# Altium PCB Bluetooth_Amplifier.PcbDoc
Units mm, origin at the board's own origin, x right, y up, seen from the top; angles counter-clockwise.
Board outline 110 x 60 mm, 2 copper layers (Top Layer, Bottom Layer); 145 components, 98 nets, 434 pads, 74 vias.
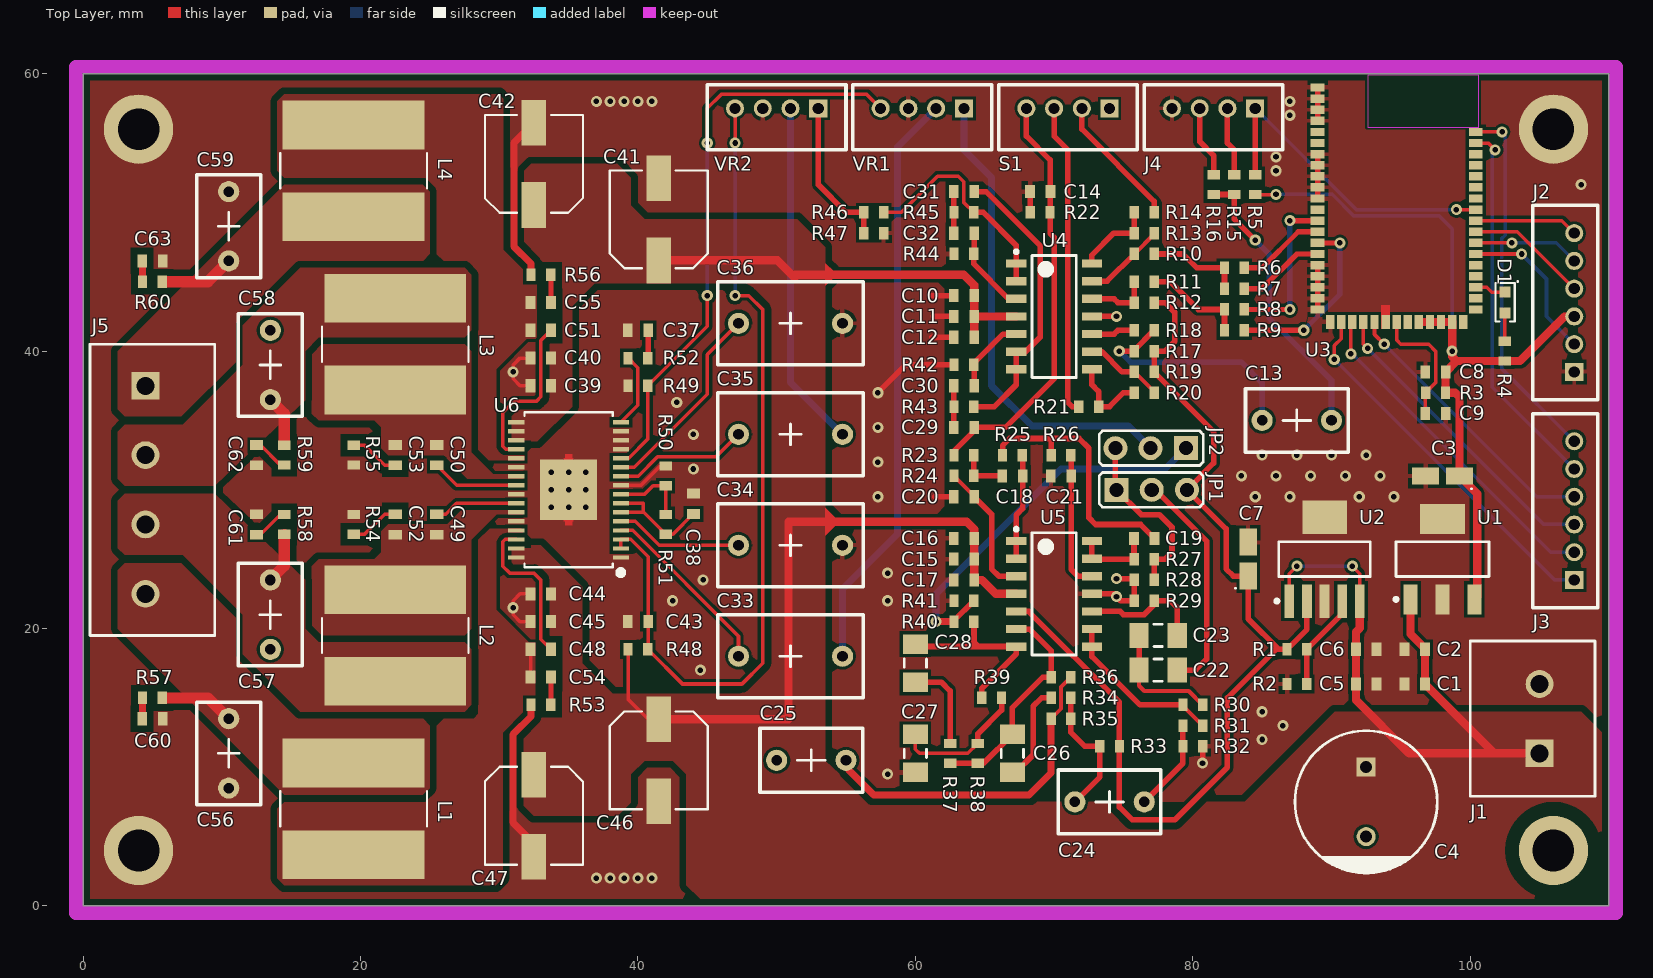
[diagram p0: Top Layer view]
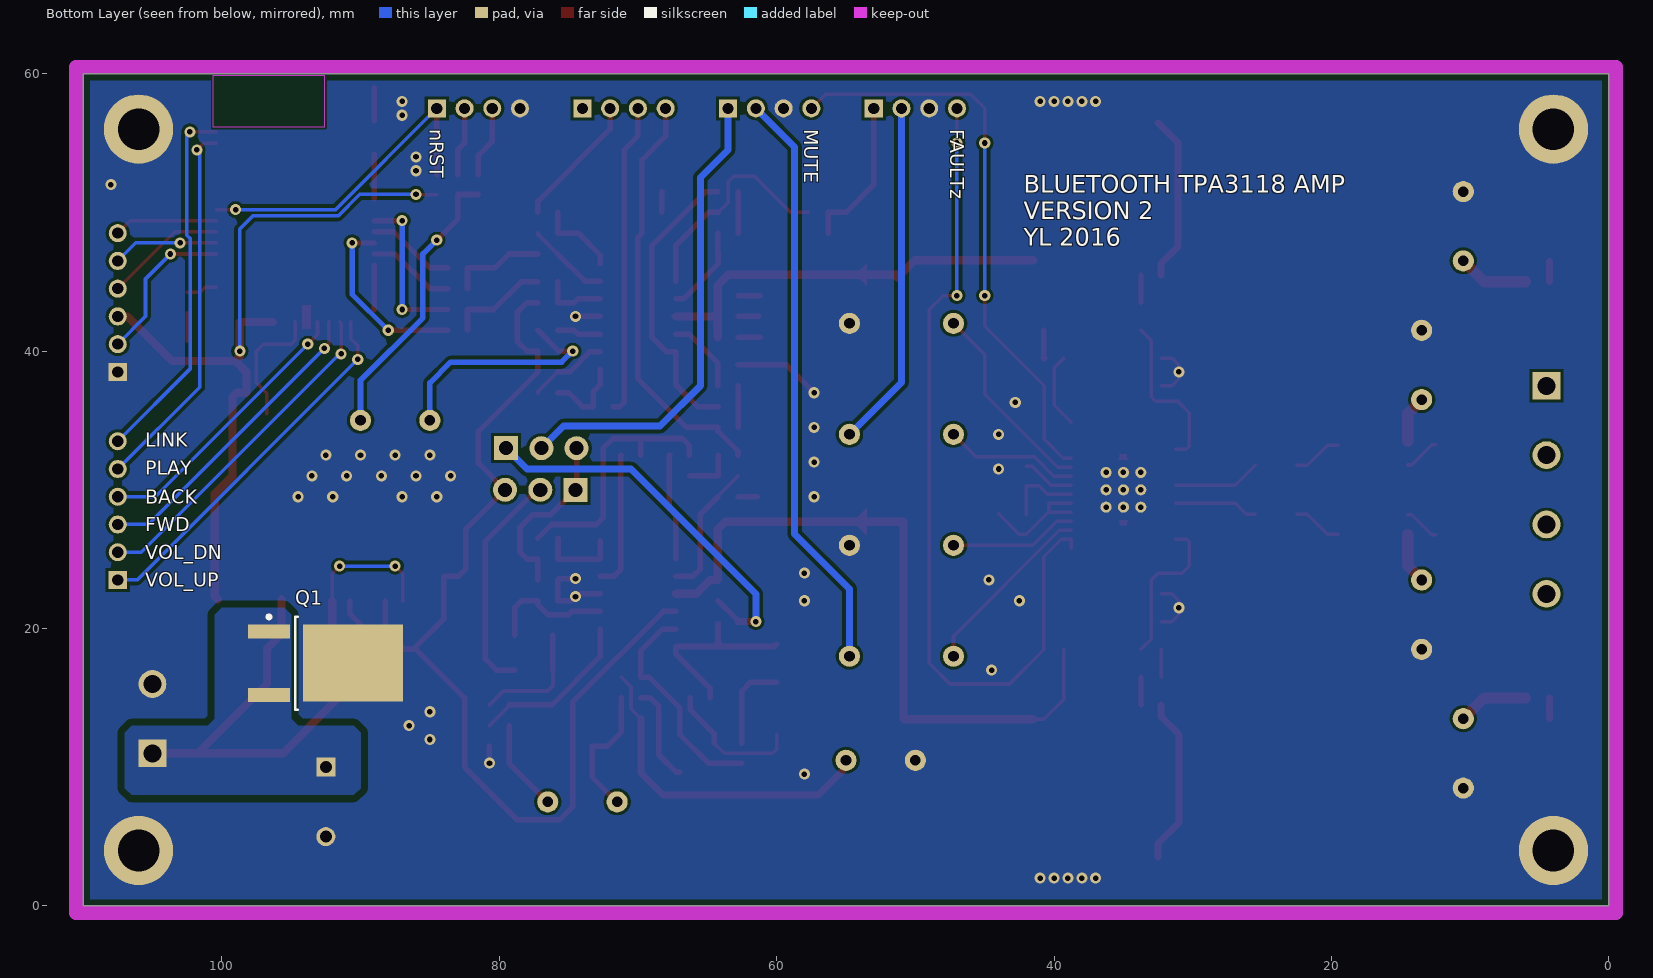
[diagram p1: Bottom Layer view, seen from below]

## Layer stack, top to bottom
Top Solder: solder mask 0.0102, Solder Resist, Dk 3.5
Top Layer: signal copper 0.0356
Dielectric 1: dielectric 0.32, FR-4, Dk 4.8
Bottom Layer: signal copper 0.0356
Bottom Solder: solder mask 0.0102, Solder Resist, Dk 3.5

## Board outline
0,0 110,0 110,60 0,60

## Design rules (kind name [scope] priority, off if disabled: settings)
Clearance Clearance_1 [(ObjectKind = 'Pad') And (Net = 'GND') And (AsMM(HoleDiameter) = 3)] p1: gap=0.203 except(0.152: SMDPad-SMDPad; 0.5: Poly-Poly; 1: THPad-Poly)
Clearance Clearance_6 [InNamedPolygon('GND_LEFT_HALF') or InNamedPolygon('V+_L02_P052')] p2: gap=0.203 except(0.152: SMDPad-SMDPad; 0.254: Via-Poly; 0.4: Arc-Poly THPad-Poly Fill-Poly; 0.5: Track-Poly SMDPad-Poly Poly-Poly Poly-Region)
Clearance Clearance_4 [InNamedPolygon('GND_LEFT_HALF') vs InNamedPolygon('NETC51_2_L01_P036') Or  InNamedPolygon('NETC48_2_L01_P050') Or InNamedPolygon('3V3_L01_P060')      Or InNamedPolygon('V+_L01_P042')    Or (InNet('V+'))] p3: gap=0.2 except(0.254: SMDPad-Poly THPad-Poly Via-Poly Fill-Poly Poly-Region Poly-Text; 0.5: Track-Poly Poly-Poly)
Clearance Clearance_2 [InNamedPolygon('OUT_HIGH_P_L01_P026') Or  InNamedPolygon('OUT_HIGH_N_L01_P028') Or  InNamedPolygon('OUT_LOW_N_L01_P044') Or  InNamedPolygon('OUT_LOW_P_L01_P046')] p4: gap=0.2 except(0.5: Poly-Poly)
Clearance Clearance_5 [InNamedPolygon('V+_L01_P042')] p5: gap=0.203 except(0.152: SMDPad-SMDPad; 0.5: Track-Poly SMDPad-Poly Poly-Poly)
Clearance Clearance_3 [InNamedPolygon('GND_L01_P068')] p6: gap=0.2 except(0.254: Arc-Poly Track-Poly SMDPad-Poly THPad-Poly Via-Poly Fill-Poly Poly-Poly Poly-Region Poly-Text)
Clearance [All] p7: gap=0.203 except(0.152: SMDPad-SMDPad; 0.254: Track-Poly SMDPad-Poly Poly-Poly; 0.5: Poly-Region)
ComponentClearance [All] p1: gap=0.203 collisioncheckmode=3 verticalgap=0.254 showdistances=FALSE
HoleSize [All] p1: absolutevalues=TRUE maxlimit=6.731 minlimit=0.33 maxpercent=80.000 minpercent=20.000
MinimumAnnularRing [All] p1: minimumring=0.178
MinimumSolderMaskSliver [All] p1: minsoldermaskwidth=0.102
PolygonConnect PolygonConnect_Vias [InComponent(C1)or InComponent(C2)or InComponent(C5)  or InComponent(C6)    or ((ObjectKind = 'Pad') And (Net = 'GND') And (AsMM(HoleDiameter) = 3)) or InComponent('U1') or InComponent ('U2')  or InComponent('J1')] p1: connectstyle=Direct reliefconductorwidth=0.254 reliefentries=4 polygonreliefangle="90 Angle" airgapwidth=0.254
PolygonConnect PolygonConnect_Vias_1 [All vs isVia] p2: connectstyle=Direct reliefconductorwidth=0.254 reliefentries=4 polygonreliefangle="90 Angle" airgapwidth=0.254
PolygonConnect PolygonConnect_1 [All vs IsNamedPolygon('GND_FILTER')] p3: connectstyle=Relief reliefconductorwidth=0.3 reliefentries=4 polygonreliefangle="90 Angle" airgapwidth=0.254
PolygonConnect [All] p4: connectstyle=Direct reliefconductorwidth=0.762 reliefentries=4 polygonreliefangle="90 Angle" airgapwidth=0.254
RoutingVias [All] p1: holewidth=0.4 width=0.8 viastyle="Through Hole" minholewidth=0.3 minwidth=0.6 maxholewidth=0.75 maxwidth=1.5
SolderMaskExpansion SolderMaskExpansion_Fine [IsPad and InComponent('U2')] p1 off: expansion=0.051
SolderMaskExpansion [All] p2: expansion=0.102
Width [All] p1: maxlimit=5.08 minlimit=0.203 preferedwidth=0.254
27 further rules are at their usual default settings.

## Classes and differential pairs
component class Power_Amplifier: C33 C34 C35 C36 C37 C38 C39 C40 C41 C42 C43 C44 C45 C46 C47 C48 C49 C50 C51 C52 C53 C54 C55 C56 C57 C58 C59 C60 C61 C62 C63 J5 L1 L2 L3 L4 R48 R49 R50 R51 R52 R53 R54 R55 R56 R57 R58 R59 R60 U6
component class BC127: C8 C9 D1 J2 J3 R3 R4 R5 U3
component class Filter_Section: C15 C16 C17 C18 C19 C20 C21 C22 C23 C24 C25 C26 C27 C28 C29 C30 C31 C32 JP1 JP2 R23 R24 R25 R26 R27 R28 R29 R30 R31 R32 R33 R34 R35 R36 R37 R38 R39 R40 R41 R42 R43 R44 R45 R46 R47 U4 U5 VR1 VR2
component class Input_Section: C10 C11 C12 C13 C14 J4 R6 R7 R8 R9 R10 R11 R12 R13 R14 R15 R16 R17 R18 R19 R20 R21 R22 S1
component class Power_Supply: C1 C2 C3 C4 C5 C6 C7 J1 Q1 R1 R2 U1 U2

## Components (designator, comment, footprint, x,y, rotation, side; value= is the part's Value field where it differs from the comment)
C1 "1uF" CAPC1608X09N 96,16 r180 top
C2 "0.1uF" CAPC1608X09N 96,18.5 r0 top
C3 "10uF" CAPMP3216X18N 98,31 r180 top
C4 "1000uF" "NICHICON UVZ 5MM" 92.5,5 r270 top
C5 "1uF" CAPC1608X09N 92.5,16 r0 top
C6 "0.01uF" CAPC1608X09N 92.5,18.5 r180 top
C7 "10uF" CAPMP3216X18N 84,25 r90 top
C8 "0.1uF" CAPC1608X09N 97.5,38.5 r0 top
C9 "1uF" CAPC1608X09N 97.5,35.5 r180 top
C10 "10nF" CAPC1608X09N 63.5,44 r0 top
C11 "0.1uF" CAPC1608X09N 63.5,42.5 r0 top
C12 "1uF" CAPC1608X09N 63.5,41 r180 top
C13 "1uF" "CAP RADIAL 5MM" 87.5,35 r180 top
C14 "0.1uF" CAPC1608X09N 69,51.5 r0 top
C15 "10nF" CAPC1608X09N 63.5,25 r0 top
C16 "0.1uF" CAPC1608X09N 63.5,26.5 r0 top
C17 "1uF" CAPC1608X09N 63.5,23.5 r180 top
C18 "4700pF" CAPC1608X09N 67,31 r0 top
C19 "4700pF" CAPC1608X09N 76.5,26.5 r180 top
C20 "2200pF" CAPC1608X09N 63.5,29.5 r0 top
C21 "2200pF" CAPC1608X09N 70.5,31 r0 top
C22 "0.1uF" CAPC3216X18N 77.5,17 r180 top
C23 "0.056uF" CAPC3216X18N 77.5,19.5 r0 top
C24 "1uF" "CAP RADIAL 5MM" 74,7.5 r180 top
C25 "0.39uF" "CAP RADIAL 5MM" 52.5,10.5 r0 top
C26 "0.068uF" CAPC3216X18N 67,11 r90 top
C27 "0.1uF" CAPC3216X18N 60,11 r270 top
C28 "0.068uF" CAPC3216X18N 60,17.5 r90 top
C29 "2200pF" CAPC1608X09N 63.5,34.5 r180 top
C30 "2200pF" CAPC1608X09N 63.5,37.5 r0 top
C31 "2200pF" CAPC1608X09N 63.5,51.5 r180 top
C32 "2200pF" CAPC1608X09N 63.5,48.5 r0 top
C33 "2.2uF" "CAP RADIAL 7.5MM" 51,18 r180 top
C34 "2.2uF" "CAP RADIAL 7.5MM" 51,26 r180 top
C35 "2.2uF" "CAP RADIAL 7.5MM" 51,34 r180 top
C36 "2.2uF" "CAP RADIAL 7.5MM" 51,42 r180 top
C37 "47pF" CAPC1608X09N 40,41.5 r0 top
C38 "1uF" CAPC1608X09N 44,29 r90 top
C39 "1000pF" CAPC1608X09N 33,37.5 r0 top
C40 "1uF" CAPC1608X09N 33,39.5 r0 top
C41 "47uF" CAP_EEFK_D 41.5,49.5 r90 top
C42 "47uF" CAP_EEFK_D 32.5,53.5 r90 top
C43 "1uF" CAPC1608X09N 40,20.5 r0 top
C44 "1000pF" CAPC1608X09N 33,22.5 r0 top
C45 "1uF" CAPC1608X09N 33,20.5 r0 top
C46 "47uF" CAP_EEFK_D 41.5,10.5 r270 top
C47 "47uF" CAP_EEFK_D 32.5,6.5 r270 top
C48 "0.22uF" CAPC1608X09N 33,18.5 r180 top
C49 "0.22uF" CAPC1608X09N 25.5,27.5 r270 top
C50 "0.22uF" CAPC1608X09N 25.5,32.5 r90 top
C51 "0.22uF" CAPC1608X09N 33,41.5 r180 top
C52 "330pF" CAPC1608X09N 22.5,27.5 r90 top
C53 "330pF" CAPC1608X09N 22.5,32.5 r270 top
C54 "330pF" CAPC1608X09N 33,16.5 r0 top
C55 "330pF" CAPC1608X09N 33,43.5 r0 top
C56 "0.68uF" "CAP RADIAL 5MM" 10.5,11 r90 top
C57 "0.68uF" "CAP RADIAL 5MM" 13.5,21 r270 top
C58 "0.68uF" "CAP RADIAL 5MM" 13.5,39 r270 top
C59 "0.68uF" "CAP RADIAL 5MM" 10.5,49 r90 top
C60 "0.01uF" CAPC1608X09N 5,13.5 r180 top
C61 "0.01uF" CAPC1608X09N 12.5,27.5 r90 top
C62 "0.01uF" CAPC1608X09N 12.5,32.5 r90 top
C63 "0.01uF" CAPC1608X09N 5,46.5 r0 top
D1 "LED 0603" DIOM1608X08N 102.5,43.5 r270 top
J1 "TERMINAL BLOCK 2POS" "TERMINAL BLOCK 5MM 2POS" 105,11 r90 top
J2 "6POS THRU HOLE 2.0MM" "JST PH-6" 107.5,38.5 r90 top
J3 "6POS THRU HOLE 2.0MM" "JST PH-6" 107.5,23.5 r90 top
J4 "3.5mm Audio Jack" "JST PH-4" 84.5,57.5 r180 top
J5 "TERMINAL BLOCK 4POS" "TERMINAL BLOCK 5MM 4POS" 4.5,37.5 r270 top
JP1 "JUMPER 3POS THRU HOLE 2.54MM" "3 POSITION 2.54MM THRU-HOLE" 74.5,30 r0 top
JP2 "JUMPER 3POS THRU HOLE 2.54MM" "3 POSITION 2.54MM THRU-HOLE" 79.5,33 r180 top
L1 "10uH" IND_BOURNS_SRN10 19.5,7 r90 top
L2 "10uH" IND_BOURNS_SRN10 22.5,19.5 r270 top
L3 "10uH" IND_BOURNS_SRN10 22.5,40.5 r90 top
L4 "10uH" IND_BOURNS_SRN10 19.5,53 r270 top
Q1 "IRFR8314TRPBF" DPAK229P991X239-3N 92.5,17.5 r180 bottom
R1 "11K" RESC1608X06N 87.5,18.5 r180 top
R2 "4.02K" RESC1608X06N 87.5,16 r0 top
R3 "20K" RESC1608X06N 97.5,37 r0 top
R4 "470R" RESC1608X06N 102.5,40 r270 top
R5 "10k" RESC1608X06N 84.5,52 r270 top
R6 "1k" RESC1608X06N 83,46 r180 top
R7 "1k" RESC1608X06N 83,44.5 r180 top
R8 "1k" RESC1608X06N 83,43 r180 top
R9 "1k" RESC1608X06N 83,41.5 r180 top
R10 "10k" RESC1608X06N 76.5,47 r180 top
R11 "10k" RESC1608X06N 76.5,45 r180 top
R12 "10k" RESC1608X06N 76.5,43.5 r180 top
R13 "10k" RESC1608X06N 76.5,48.5 r180 top
R14 "100R" RESC1608X06N 76.5,50 r0 top
R15 "1k" RESC1608X06N 83,52 r270 top
R16 "1k" RESC1608X06N 81.5,52 r270 top
R17 "100K" RESC1608X06N 76.5,40 r180 top
R18 "1k" RESC1608X06N 76.5,41.5 r180 top
R19 "10k" RESC1608X06N 76.5,38.5 r180 top
R20 "10k" RESC1608X06N 76.5,37 r180 top
R21 "100R" RESC1608X06N 72.5,36 r180 top
R22 "100K" RESC1608X06N 69,50 r0 top
R23 "10k" RESC1608X06N 63.5,32.5 r0 top
R24 "10k" RESC1608X06N 63.5,31 r180 top
R25 "10k" RESC1608X06N 67,32.5 r180 top
R26 "10k" RESC1608X06N 70.5,32.5 r0 top
R27 "100R" RESC1608X06N 76.5,25 r0 top
R28 "100K" RESC1608X06N 76.5,23.5 r0 top
R29 "56.2K" RESC1608X06N 76.5,22 r0 top
R30 "26.1K" RESC1608X06N 80,14.5 r180 top
R31 "100R" RESC1608X06N 80,13 r180 top
R32 "100K" RESC1608X06N 80,11.5 r180 top
R33 "100K" RESC1608X06N 74,11.5 r180 top
R34 "13k" RESC1608X06N 70.5,15 r180 top
R35 "8.06K" RESC1608X06N 70.5,13.5 r180 top
R36 "8.06K" RESC1608X06N 70.5,16.5 r180 top
R37 "13k" RESC1608X06N 62.5,11 r90 top
R38 "35K" RESC1608X06N 64.5,11 r90 top
R39 "35K" RESC1608X06N 65.5,15 r180 top
R40 "100R" RESC1608X06N 63.5,20.5 r180 top
R41 "100K" RESC1608X06N 63.5,22 r0 top
R42 "20K" RESC1608X06N 63.5,39 r0 top
R43 "10k" RESC1608X06N 63.5,36 r0 top
R44 "20K" RESC1608X06N 63.5,47 r180 top
R45 "10k" RESC1608X06N 63.5,50 r0 top
R46 "100R" RESC1608X06N 57,50 r180 top
R47 "100K" RESC1608X06N 57,48.5 r180 top
R48 "100K" RESC1608X06N 40,18.5 r180 top
R49 "100K" RESC1608X06N 40,37.5 r0 top
R50 "20K" RESC1608X06N 42,31 r270 top
R51 "100K" RESC1608X06N 42,27.5 r270 top
R52 "4.7K" RESC1608X06N 40,39.5 r180 top
R53 "10R" RESC1608X06N 33,14.5 r180 top
R54 "10R" RESC1608X06N 19.5,27.5 r90 top
R55 "10R" RESC1608X06N 19.5,32.5 r270 top
R56 "10R" RESC1608X06N 33,45.5 r180 top
R57 "3.32R" RESC1608X06N 5,15 r0 top
R58 "3.32R" RESC1608X06N 14.5,27.5 r90 top
R59 "3.32R" RESC1608X06N 14.5,32.5 r90 top
R60 "3.32R" RESC1608X06N 5,45 r180 top
S1 "SPDT Switch" "JST PH-4" 74,57.5 r180 top
U1 "LM2937IMP-3.3/NOPB" "SOT230P700X180-4N (DCY)" 98,25 r90 top
U2 "TPS73801DCQR" "SOT127P705X180-6M (DCQ)" 89.5,25 r90 top
U3 "BC127" BC127 89,59 r0 top
U4 "OPA4134UA" SOIC127P600X175-14N 70,42.5 r0 top
U5 "OPA4134UA" SOIC127P600X175-14N 70,22.5 r0 top
U6 "TPA3116D2" DAP0032A 35,30 r180 top
VR1 "*" "JST PH-4" 63.5,57.5 r180 top
VR2 "*" "JST PH-4" 53,57.5 r180 top

## Footprints (in the part's own frame and the unit in brackets; to place one, negate y for a bottom-side part, rotate by r counter-clockwise, add the part's x,y. Pads: shape width x height; smd on the part's side, far side on the other; paste and mask are expansions set on the pad)
"3 POSITION 2.54MM THRU-HOLE" [mil] "Jumper, Through-hole, 2.54mm Pitch"
  rect 67.99x67.99 hole 40: 1(0,0)
  round 67.99 hole 40: 2(100,0) 3(200,0)
  silkscreen extent -49,-49 246,49, body extent -52,-49 248,49, height 364
BC127 [mm]
  rect 1x0.6 smd mask+0: 1(0,0) 2(0,-0.8) 3(0,-1.6) 4(0,-2.4) 5(0,-3.2) 6(0,-4) 7(0,-4.8) 8(0,-5.6) 9(0,-6.4) 10(0,-7.2) 11(0,-8) 12(0,-8.8) 13(0,-9.6) 14(0,-10.4) 15(0,-11.2) 16(0,-12) 17(0,-12.8) 18(0,-13.6) 19(0,-14.4) 20(0,-15.2) 21(0,-16) 35(11.4,-16) 36(11.4,-15.2) 37(11.4,-14.4) 38(11.4,-13.6) 39(11.4,-12.8) 40(11.4,-12) 41(11.4,-11.2) 42(11.4,-10.4) 43(11.4,-9.6) 44(11.4,-8.8) 45(11.4,-8) 46(11.4,-7.2) 47(11.4,-6.4) 48(11.4,-5.6) 49(11.4,-4.8) 50(11.4,-4) 51(11.4,-3.2)
  rect 0.6x1 smd mask+0: 22(0.9,-16.9) 23(1.7,-16.9) 24(2.5,-16.9) 25(3.3,-16.9) 26(4.1,-16.9) 27(4.9,-16.9) 28(5.7,-16.9) 29(6.5,-16.9) 30(7.3,-16.9) 31(8.1,-16.9) 32(8.9,-16.9) 33(9.7,-16.9) 34(10.5,-16.9)
  Keep-Out Layer region: 3.6,-2.85 11.6,-2.85 11.6,0.9 3.6,0.9
  body extent -0.2,-17.1 11.6,0.9, height 2.5
"CAP RADIAL 5MM" [mil]
  round 60 hole 30: 1(-98.43,0) 2(98.43,0)
  silkscreen extent -146,-91 146,91, body extent -144,-89 144,89, height 374
"CAP RADIAL 7.5MM" [mil]
  round 60 hole 30: 1(-147.64,0) 2(147.64,0)
  silkscreen extent -207,-118 207,118, body extent -203,-118 203,118, height 472
CAP_EEFK_D [mil]
  rect 130x70 smd: 1(-116.5,0) 2(116.5,0)
  silkscreen extent -139,-139 139,139, body extent -153,-134 154,134, height 242
CAPC1608X09N [mm] "Chip Capacitor, 2-Leads, Body 1.60x0.80mm, IPC Medium Density"
  rect 0.7x0.95 smd: 1(-0.738,0) 2(0.738,0)
  body extent -0.85,-0.45 0.85,0.45, height 0.8
CAPC3216X18N [mm] "Chip Capacitor, 2-Leads, Body 3.20x1.60mm, IPC Medium Density"
  rect 1.4x1.8 smd: 1(-1.375,0) 2(1.375,0)
  silkscreen extent -0.3,-0.8 0.3,0.8, body extent -1.68,-0.87 1.67,0.87, height 1.8
CAPMP3216X18N [mm] "Molded Capacitor, 2-Leads, Body 3.20x1.60mm, IPC Medium Density"
  rect 1.95x1.25 smd: 1(-1.225,0) 2(1.225,0)
  silkscreen extent -2.15,0.88 -2.05,0.97, body extent -1.92,-0.9 1.92,0.9, height 1.8
DAP0032A [mil]
  rect 46x12 smd paste-4 mask+2: 1(-148.5,191.93) 2(-148.5,166.34) 3(-148.5,140.75) 4(-148.5,115.16) 5(-148.5,89.57) 6(-148.5,63.98) 7(-148.5,38.39) 8(-148.5,12.8) 9(-148.5,-12.8) 10(-148.5,-38.39) 11(-148.5,-63.98) 12(-148.5,-89.57) 13(-148.5,-115.16) 14(-148.5,-140.75) 15(-148.5,-166.34) 16(-148.5,-191.93) 17(148.5,-191.93) 18(148.5,-166.34) 19(148.5,-140.75) 20(148.5,-115.16) 21(148.5,-89.57) 22(148.5,-63.98) 23(148.5,-38.39) 24(148.5,-12.8) 25(148.5,12.8) 26(148.5,38.39) 27(148.5,63.98) 28(148.5,89.57) 29(148.5,115.16) 30(148.5,140.75) 31(148.5,166.34) 32(148.5,191.93)
  round 31.5 hole 15.75: 33(-49.21,49.21) 33(-49.21,0) 33(-49.21,-49.21) 33(0,49.21) 33(0,0) 33(0,-49.21) 33(49.21,49.21) 33(49.21,0) 33(49.21,-49.21)
  rect 161.81x171.65 smd paste-4 mask+2: 33(0,0)
  Top Layer region: 13.78,89.76 13.78,85.83 -13.78,85.83 -13.78,89.76 -9.84,89.76 -9.84,100.39 9.84,100.39 9.84,89.76
  Top Layer region: 13.78,-89.76 13.78,-85.83 -13.78,-85.83 -13.78,-89.76 -9.84,-89.76 -9.84,-100.39 9.84,-100.39 9.84,-89.76
  silkscreen extent -156,-220 125,243, body extent -160,-217 160,217, height 43
DIOM1608X08N [mm] "Molded Diode, 2-Leads, Body 1.60x0.80mm, IPC Medium Density"
  rect 0.8x0.8 smd: 1(-0.75,0) 2(0.75,0)
  silkscreen extent -1.57,-0.69 1.38,0.97, body extent -0.8,-0.4 0.8,0.4, height 0.8
DPAK229P991X239-3N [mm] "D-PAK, 3-Pads, Body 6.21x6.73mm (max), IPC Medium Density"
  rect 3x1 smd: 1(-4.1,2.29) 3(-4.1,-2.29)
  rect 7.2x5.55 smd: 4(1.95,0)
  silkscreen extent -4.23,-3.35 -2.05,3.46, body extent -4.6,-3.38 5.3,3.37, height 2.52
IND_BOURNS_SRN10 [mil]
  rect 138x402 smd: 1(-130,0) 2(130,0)
  silkscreen extent -50,-208 50,208, body extent -199,-203 199,203, height 236
"JST PH-4" [mm]
  rect 1.3x1.3 hole 0.8: 1(0,0)
  round 1.3 hole 0.8: 2(2,0) 3(4,0) 4(6,0)
  silkscreen extent -2,-1.7 8,3, body extent -1.95,-1.63 7.95,2.87, height 6
"JST PH-6" [mm]
  rect 1.3x1.3 hole 0.8: 1(0,0)
  round 1.3 hole 0.8: 2(2,0) 3(4,0) 4(6,0) 5(8,0) 6(10,0)
  silkscreen extent -2,-1.7 12,3, body extent -1.95,-1.65 11.95,2.85, height 6
"NICHICON UVZ 5MM" [mil]
  rect 54x54 / inner round 60 / far side rect 54x54 hole 34: 1(-197,0)
  round 54 / inner round 60 / far side round 54 hole 34: 2(0,0)
  silkscreen extent -300,-202 104,202, body extent -295,-197 100,197, height 778
RESC1608X06N [mm] "Chip Resistor, 2-Leads, Body 1.60x0.80mm, IPC Medium Density"
  rect 0.67x0.9 smd: 1(-0.713,0) 2(0.712,0)
  body extent -0.85,-0.45 0.85,0.45, height 0.55
SOIC127P600X175-14N [mm] "SOIC, 14-Leads, Body 8.65x3.90mm, Pitch 1.27mm, IPC Medium Density"
  rect 1.45x0.6 smd: 1(-2.725,3.81) 2(-2.725,2.54) 3(-2.725,1.27) 4(-2.725,0) 5(-2.725,-1.27) 6(-2.725,-2.54) 7(-2.725,-3.81) 8(2.725,-3.81) 9(2.725,-2.54) 10(2.725,-1.27) 11(2.725,0) 12(2.725,1.27) 13(2.725,2.54) 14(2.725,3.81)
  silkscreen extent -2.85,-4.4 1.6,4.78, body extent -2,-4.4 2,4.4, height 1.75
"SOT127P705X180-6M (DCQ)" [mm] "SOT223, 6-Leads, Body 6.50x7.05mm (avg), Pitch 1.27mm, IPC Low Density"
  rect 2.4x0.7 smd: 1(-3.025,2.54) 2(-3.025,1.27) 3(-3.025,0) 4(-3.025,-1.27) 5(-3.025,-2.54)
  rect 2.4x3.2 smd: 6(3.025,0)
  silkscreen extent -3.15,-3.3 1.25,3.56, body extent -3.53,-3.27 3.53,3.27, height 1.8
"SOT230P700X180-4N (DCY)" [mm] "SOT223, 4-Leads, Body 6.50x7.00mm (avg), Pitch 2.30mm, IPC Medium Density"
  rect 2.15x1 smd: 1(-2.9,2.3) 2(-2.9,0) 3(-2.9,-2.3)
  rect 2.15x3.25 smd: 4(2.9,0)
  silkscreen extent -3.02,-3.35 1.25,3.47, body extent -3.5,-3.35 3.5,3.35, height 1.8
"TERMINAL BLOCK 5MM 2POS" [mm]
  rect 2x2 hole 1.3: 1(0,0)
  round 2 hole 1.3: 2(5,0)
  silkscreen extent -3.1,-4 8.1,5, body extent -2.5,-4 7.5,5, height 12.6
"TERMINAL BLOCK 5MM 4POS" [mm]
  rect 2x2 hole 1.3: 1(0,0)
  round 2 hole 1.3: 2(5,0) 3(10,0) 4(15,0)
  silkscreen extent -3,-4 18,5, body extent -2.5,-4 17.5,5, height 12.6

## Part data
C1 C5 C9 C12 C17 C38 C40 C43 C45: library part "CAP CER 1uF 0603"
C2 C8 C11 C14 C16: library part "CAP CER 0.1uF 0603"
C3 C7: library part "CAP TANT 10uF 1.8 OHM 10V 1206"
C4: library part "CAP ALUM 1000uF SMD", "Input Bulk Cap"
C6 C60 C61 C62 C63: library part "CAP CER 0.01uF 0603"
C10 C15: library part "CAP CER 10nF 0603", "Bypass caps"
C13 C24: library part "CAP FILM 1uF RADIAL 5MM", "Audio coupling cap"
C18 C19: library part "CAP CER 4700pF 0603"
C20 C21 C29 C30 C31 C32: library part "CAP CER 2200pF 0603"
C22 C27: library part "CAP CER 0.1uF C0G 1206"
C23: library part "CAP CER 0.056uF C0G 1206"
C25: library part "CAP 0.39uF Radial 5mm", "Film cap in LT"
C26 C28: library part "CAP CER 0.068uF 1206"
C33 C34 C35 C36: library part "CAP FILM 2.2uF RADIAL 7.5MM", "Audio coupling cap"
C37: library part "CAP CER 47pF 0603"
C39 C44: library part "CAP CER 1000pF 0603"
C41 C42 C46 C47: library part "CAP ALUM 47uF SMD"
C48 C49 C50 C51: library part "CAP CER 0.22uF 0603"
C52 C53 C54 C55: library part "CAP CER 330pF 0603"
C56 C57 C58 C59: library part "CAP 0.68uF Radial 5mm", "Output Cap"
L1 L2 L3 L4: library part "IND 10uH 5A SMD"
Q1: library part MOSFET_N_CH_30V_179A_D2PAK, "Reverse Voltage Power MOSFET"
R1: library part "RES 11K 0603"
R2: library part "RES 4.02K 0603"
R3 R42 R44 R50: library part "RES 20K 0603"
R4: library part "RES 470R 0603"
R5 R10 R11 R12 R13 R19 R20 R23 R24 R25 R26 R43 R45: library part "RES 10K 0603"
R6 R7 R8 R9 R15 R16 R18: library part "RES 1K 0603"
R14 R21 R27 R31 R40 R46: library part "RES 100R 0603"
R17 R22 R28 R32 R33 R41 R47 R48 R49 R51: library part "RES 100K 0603"
R29: library part "RES 56.2K 0603"
R30: library part "RES 26.1K 0603"
R34 R37: library part "RES 13K 0603"
R35 R36: library part "RES 8.06K 0603"
R38 R39: library part "RES 35K 0603"
R52: library part "RES 4.7K 0603"
R53 R54 R55 R56: library part "RES 10R 0603"
R57 R58 R59 R60: library part "RES 3.32R 0603"
U2: "Adjustable 1.21V-20V 1A Regulator"
U4 U5: "Quad OPAx134 Operational Amplifier"
VR1 VR2: library part Potentiometer

## Free pads (board coordinates)
  round 5 hole 3: 0(4,4) 0(4,56) 0(106,4) 0(106,56)

## Via types
v1: diameter 0.8, hole 0.4, Top Layer to Bottom Layer, tented both sides, 74 vias

## Nets (pads, with @x,y where several pads share a name; then routed paths per layer and width w, separated by ;. In a path a pad name is that pad's centre, name@x,y a point inside that pad or via, vN(x,y) a via of type N, cw(c..) or ccw(c..) an arc to the next point about the centre after c; other vN are vias at no path point)
3V3: C3.1 C8.2 J2.3 R3.2 R4.2 R5.2 U1.3 U3.30 U3.31 U3.32 U3.33 | length 58.1
  Top Layer w0.254: R5.2 85.987,51.287 v1(86,51.3)
  Top Layer w0.6: U3.30@96.303,42.1 98.697,42.1 98.697,40.003 v1(98.7,40) 98.7,39.613 99.025,39.288 ; U1.3 100.5,22.3 100.5,29.725 C3.1 99.225,36.675 98.9,37 R3.2 98.213,38.475 C8.2 99.025,39.288 ; J2.3 106.8,42.5 103.588,39.288 R4.2 99.025,39.288
  Bottom Layer w0.254: v1(86,51.3) 90.053,51.3 91.611,49.743 97.757,49.743 98.7,48.8 v1(98.7,40)
BACK: J3.4 U3.26 | length 20.1
  Top Layer w0.254: U3.26 93.1,41.2 v1(93.8,40.5)
  Bottom Layer w0.254: v1(93.8,40.5) 104.8,29.5 J3.4
BC127_CTS: J2.2 U3.40 | length 11.4
  Top Layer w0.254: U3.40 v1(103.7,47)
  Bottom Layer w0.254: v1(103.7,47) 105.5,45.2 105.5,42.5 J2.2
BC127_LN: R8.1 U3.13 | length 11.7
  Top Layer w0.381: R8.1 v1(87,43) ; v1(87,49.4) U3.13
  Bottom Layer w0.381: v1(87,43) v1(87,49.4)
BC127_LP: R6.1 U3.14 | length 6.4
  Top Layer w0.381: R6.1 85,46 87.6,48.6 U3.14
BC127_NRST: J4.1 R5.1 U3.44 | length 23.7
  Top Layer w0.254: v1(99,50.2) U3.44
  Top Layer w0.4: R5.1 J4.1
  Bottom Layer w0.254: J4.1 91.8,50.2 v1(99,50.2)
BC127_OUT: R14.2 S1.2 | length 9.7
  Top Layer w0.4: S1.2 72,56 77.212,50.788 R14.2
BC127_RN: R9.1 U3.15 | length 13.3
  Top Layer w0.381: R9.1 v1(88,41.5) ; U3.15 v1(90.6,47.8)
  Bottom Layer w0.381: v1(88,41.5) 90.6,44.1 v1(90.6,47.8)
BC127_RP: R7.1 U3.16 | length 6.3
  Top Layer w0.381: R7.1 85,44.5 87.5,47 U3.16
BC127_RTS: J2.6 U3.43 | length 7.5
  Top Layer w0.254: U3.43 106.6,49.4 J2.6
BC127_RX: J2.4 U3.42 | length 8.8
  Top Layer w0.254: U3.42 103.4,48.6 J2.4
BC127_TX: J2.5 U3.41 | length 7.6
  Top Layer w0.254: U3.41 v1(103,47.8)
  Bottom Layer w0.254: v1(103,47.8) 106.2,47.8 J2.5
CROSSOVER_IN: C14.2 C29.1 R22.2 R23.1 S1.4 | length 30.1
  Top Layer w0.4: R23.1 62.787,32.787 64.238,34.238 C29.1 66.5,34.5 70,38 70,48.2 69.712,48.488 R22.2 69.712,53.788 68,55.5 S1.4
FAULTZ: C43.2 R48.1 U6.2 U6.3 VR2.4 | length 61.2
  Top Layer w0.254: U6.2 U6.3 39.475,26.425 40.737,25.163 C43.2 40.737,18.525 R48.1 43.212,16 47.5,16 49,17.5 49,43 48,44 v1(47,44) ; v1(47,55) VR2.4
  Bottom Layer w0.254: v1(47,44) v1(47,55)
FORWARD: J3.3 U3.25 | length 22.2
  Top Layer w0.254: U3.25 92.3,40.5 v1(92.6,40.2)
  Bottom Layer w0.254: v1(92.6,40.2) 105.3,27.5 J3.3
GND: C1.2 C2.1 C3.2 C4.2 C5.2 C6.1 C7.2 C8.1 C9.1 C10.1 C11.1 C12.2 C14.1 C15.1 C16.1 C17.2 C20.1 C21.1 C25.1 C27.2 C34.1 C36.1 C37.1 C38.2 C39.1 C40.1 C41.2 C42.2 C43.1 C44.1 C45.1 C46.2 C47.2 C56.1 C57.2 C58.1 C59.2 C60.1 C61.2 C62.1 C63.2 J1.2 J2.1 J4.4 pad.0 Q1.4 R2.1 R22.1 R28.1 R29.1 R32.1 R41.1 R42.1 R44.2 R47.1 R49.1 R50.1 R53.2 R54.2 R55.2 R56.2 U1.2 U1.4 U2.3 U2.6 U3.1 U3.2 U3.3 U3.4 U3.7 U3.8 U3.9 U3.10 U3.11 U3.17 U3.18 U3.19 U3.20 U3.21 U3.22 U3.27 U4.11 U5.11 U6.1 U6.9 U6.13 U6.14 U6.15 U6.22 U6.25 U6.28 U6.33 VR1.3 VR2.3 | length 67.5
  Top Layer w0.254: C45.1 31.5,20.5 31,21 v1(31,21.5) 31,22 31.5,22.5 C44.1 ; C39.1 31.5,37.5 31,38 v1(31,38.5) 31,39 31.5,39.5 C40.1 ; U6.9 40.225,30.325 41.613,31.713 R50.1
  Top Layer w0.4: v1(57.3,37) 59.3,39 R42.1 ; 61.2,41 C12.2 ; 61.2,44 C10.1 ; 61.3,42.5 C11.1 ; 61.4,29.5 C20.1 ; C14.1 68.287,51.475 R22.1 ; U5.11 74.3,22.5 v1(74.5,22.3) 74.8,22 R29.1 R28.1 75.687,23.6 v1(74.5,23.6) ; U4.11 v1(74.5,42.5) ; v1(80.7,10.3) 80.713,10.313 R32.1 ; U3.21 U3.20 U3.19 U3.18 U3.17 ; U3.11 U3.10 U3.9 U3.8 U3.7 ; U3.4 U3.3 U3.2 U3.1
  Top Layer w0.508: R53.2 32.288,13.663 31,12.375 31,6 32.5,4.5 C47.2 ; R56.2 32.288,46.313 31.05,47.55 31.05,55.009 C42.2
  other v1: 37,2 38,2 39,2 40,2 41,2 58,9.5 85,12 86.5,13 85,14 44.5,17 42.5,22 58,22 44.7,23.5 58,24 57.3,29.5 84.5,29.5 87,29.5 92,29.5 94.5,29.5 83.5,31 86,31 88.5,31 91,31 93.5,31 44,31.5 57.3,32 85,32.5 87.5,32.5 90,32.5 92.5,32.5 44,34 57.3,34.5 42.8,36.3 108,52 86,53 86,54 87,57 37,58 38,58 39,58 40,58 41,58 87,58
JACK_OUT: R21.2 S1.3 | length 22.5
  Top Layer w0.4: S1.3 70,55.5 71,54.5 71,36.3 71.3,36 R21.2
LINK: J3.6 U3.51 | length 26.6
  Top Layer w0.254: U3.51@100.4,55.8 v1@102.3,55.8
  Bottom Layer w0.254: v1(102.3,55.8) 102.53,55.57 102.53,48.363 102.257,48.09 102.257,38.743 J3.6
LR4_OUT_LOW: JP1.1 JP2.3 R27.2 R28.2 | length 12.9
  Top Layer w0.4: JP2.3 74.42,30.08 JP1.1 76.3,28.2 77.6,28.2 78.5,27.3 78.5,25.5 78,25 R27.2 R28.2
LT_IN: C22.1 JP1.2 | length 16.4
  Top Layer w0.4: JP1.2 77.3,30 81,26.3 81,17.8 80.2,17 C22.1
LT_OUT: JP2.1 R40.2 R41.2 | length 27.7
  Top Layer w0.4: R40.2 62.787,20.575 R41.2
  Top Layer w0.5: v1(61.5,20.5) R40.2
  Bottom Layer w0.5: v1(61.5,20.5) 61.5,22.5 70.5,31.5 78,31.5 JP2.1
MUTE: R49.2 U6.12 VR1.4 | length 41.5
  Top Layer w0.254: U6.12 39.325,32.275 40.712,33.662 R49.2 45,41.788 v1(45,44) ; v1(45,55) 45,57.5 46,58.5 56.5,58.5 VR1.4
  Bottom Layer w0.254: v1(45,44) v1(45,55)
NetC9_2: C9.2 R3.1 U3.28 | length 9.2
  Top Layer w0.254: U3.28 94.7,40.8 95,40.5 97,40.5 97.5,40 97.5,37.712 R3.1 96.763,36.975 C9.2
NetC13_1: C13.1 R15.2 R16.2 | length 20.7
  Top Layer w0.4: R16.2 R15.2 83,49.5 v1(84.5,48)
  Bottom Layer w0.4: v1(84.5,48) 85.5,47 85.5,42.4 90,37.9 C13.1
NetC13_2: C13.2 R17.2 R18.1 | length 17.1
  Top Layer w0.4: v1(74.7,40) 75.713,40 R18.1
  Bottom Layer w0.4: v1(74.7,40) 75.5,39.2 83.5,39.2 85,37.7 C13.2
NetC18_1: C18.1 R23.2 R24.1 | length 3.6
  Top Layer w0.4: R23.2 R24.1 C18.1
NetC18_2: C18.2 R25.1 U5.1 U5.2 | length 7.7
  Top Layer w0.4: U5.2 U5.1 67.275,28.175 67.737,28.637 C18.2 67.737,32.475 R25.1
NetC19_1: C19.1 R25.2 R26.1 | length 19
  Top Layer w0.4: R25.2 66.287,33.187 66.8,33.7 69.787,33.7 ; R26.1 69.787,33.7 ; C19.1 76.237,27.5 73,27.5 72.5,28 72.5,33 71.8,33.7 69.787,33.7
NetC19_2: C19.2 R27.1 U5.13 U5.14 | length 5.8
  Top Layer w0.4: U5.14 U5.13 72.765,25 R27.1 ; R27.1@75.763,25.025 C19.2
NetC20_2: C20.2 R24.2 U5.3 | length 9.8
  Top Layer w0.3: R24.2 64.238,29.55 C20.2
  Top Layer w0.4: C20.2 65.5,28.238 65.5,24.3 66.03,23.77 U5.3
NetC21_2: C21.2 R26.2 U5.12 | length 9.9
  Top Layer w0.4: R26.2 71.237,32.475 C21.2 71.237,24.263 71.73,23.77 U5.12
NetC22_2: C22.2 C23.1 R30.1 | length 8.8
  Top Layer w0.3: C22.2 76.125,15.875 76.5,15.5 79.712,15.5 R30.1
  Top Layer w0.4: C22.2 C23.1
NetC23_2: C23.2 R29.2 U5.10 | length 9
  Top Layer w0.4: U5.10 74.77,21.23 75,21 76.5,21 77.212,21.712 R29.2 78.4,22 78.875,21.525 C23.2
NetC24_1: C24.1 R31.2 R32.2 | length 6.7
  Top Layer w0.4: C24.1 79.288,10.288 R32.2 R31.2
NetC24_2: C24.2 R33.2 R34.1 R35.1 | length 9.6
  Top Layer w0.4: R34.1 R35.1 71.213,12.513 72.225,11.5 R33.2 ; C24.2 73.3,9.3 R33.2@73.3,11.413
NetC25_2: C25.2 R35.2 R36.1 | length 24.2
  Top Layer w0.254: R35.2 70.5,14.212 70.5,15.787 R36.1
  Top Layer w0.5: C25.2@55.2,10.5 55.2,9.8 57,8 68.2,8 69.788,9.588 R35.2
NetC26_1: C26.1 R34.2 | length 7.1
  Top Layer w0.4: C26.1 67.225,9.625 68.5,10.9 68.5,14.4 69.1,15 R34.2
NetC26_2: C26.2 R36.2 R37.1 R38.1 U5.6 | length 16.1
  Top Layer w0.4: R37.1 R38.1 64.913,10.288 C26.2 67,14.3 69.2,16.5 R36.2 69.788,18.412 68.24,19.96 U5.6
NetC27_1: C27.1 R38.2 R39.1 | length 10
  Top Layer w0.254: C27.1 60,11.3 60.3,11 63.788,11 R38.2
  Top Layer w0.4: R38.2 64.5,12.4 66.212,14.112 R39.1
NetC28_1: C28.1 R37.2 | length 6.5
  Top Layer w0.4: C28.1 61.875,16.125 62.5,15.5 R37.2
NetC28_2: C28.2 R39.2 R40.1 U5.7 | length 5
  Top Layer w0.4: C28.2 C28.2@60.185,18.69 ; R39.2 64.787,15.687 67.275,18.175 U5.7
NetC29_2: C29.2 C30.1 R43.1 | length 3
  Top Layer w0.4: C29.2 C30.1
NetC30_2: C30.2 R42.2 U4.5 | length 5.5
  Top Layer w0.4: C30.2 64.238,39.138 66.33,41.23 U4.5
NetC31_1: C31.1 R43.2 U4.6 U4.7 | length 21.2
  Top Layer w0.4: R43.2 65.7,36 67.275,37.575 U4.7 U4.6 67.96,39.96 69,41 69,47.6 65.1,51.5 C31.1
NetC31_2: C31.2 C32.1 R45.1 | length 3
  Top Layer w0.4: C32.1 C31.2
NetC32_2: C32.2 R44.1 U4.3 | length 6.3
  Top Layer w0.4: C32.2 64.238,47.025 R44.1 64.213,46.287 66.73,43.77 U4.3
NetC33_2: C33.2 U6.4 | length 13.1
  Top Layer w0.254: U6.4 39.625,27.075 47.25,19.45 C33.2
NetC34_2: C34.2 U6.5 | length 9.2
  Top Layer w0.254: U6.5 39.811,27.725 41.536,26 C34.2
NetC35_2: C35.2 U6.10 | length 9.7
  Top Layer w0.254: U6.10 40.011,30.975 41.413,32.378 45.628,32.378 C35.2
NetC36_2: C36.2 U6.11 | length 14.4
  Top Layer w0.254: U6.11 39.725,31.625 45,36.9 45,39.75 C36.2
NetC37_2: C37.2 R52.1 | length 2
  Top Layer w0.381: R52.1@40.737,39.525 C37.2
  Top Layer w0.508: R52.1 R52.1@40.737,39.525
NetC38_1: C38.1 R51.2 U6.6 U6.7 | length 8.7
  Top Layer w0.254: U6.6 40.375,28.375 40.375,29.025 U6.7 ; 40.413,28.375 R51.2 42.525,26.788 C38.1
NetC48_1: C48.1 U6.30 | length 11.3
  Top Layer w0.254: U6.30 30.425,26.425 30.25,26.25 30.25,24.5 30.75,24 32.5,24 33,23.5 33,19.238 C48.1
NetC48_2: C48.2 C54.1 L1.1 U6.29 | length 2
  Top Layer w0.254: C54.1 C48.2
NetC49_1: C49.1 U6.26 | length 6.1
  Top Layer w0.254: C49.1 26.138,28.238 26.925,29.025 U6.26
NetC49_2: C49.2 C52.1 L2.1 U6.27
NetC50_1: C50.1 U6.24 | length 6.3
  Top Layer w0.254: C50.1 26.937,30.325 U6.24
NetC50_2: C50.2 C53.1 L3.1 U6.23
NetC51_1: C51.1 U6.20 | length 11.8
  Top Layer w0.254: U6.20 30.475,32.925 30.25,33.15 30.25,35.55 31.1,36.4 32.7,36.4 33,36.7 33,40.762 C51.1
NetC51_2: C51.2 C55.1 L4.1 U6.21
NetC52_2: C52.2 R54.1 | length 3.6
  Top Layer w0.254: R54.1 20.288,26.788 21.738,28.238 C52.2
NetC53_2: C53.2 R55.1 | length 3.6
  Top Layer w0.254: R55.1 20.288,33.212 21.738,31.762 C53.2
NetC54_2: C54.2 R53.1 | length 2
  Top Layer w0.381: R53.1 33.737,14.525 C54.2
NetC55_2: C55.2 R56.1 | length 2
  Top Layer w0.381: C55.2 R56.1@33.737,45.475
NetC60_2: C60.2 R57.1 | length 1.5
  Top Layer w0.5: C60.2@4.288,13.525 R57.1
  Top Layer w0.508: C60.2 C60.2@4.288,13.525
NetC61_1: C61.1 R58.2 | length 2.6
  Top Layer w0.254: C61.1 12.762,26.763 14.212,28.212 R58.2
NetC62_2: C62.2 R59.1 | length 2.6
  Top Layer w0.254: C62.2 12.762,33.238 14.213,31.787 R59.1
NetC63_1: C63.1 R60.2 | length 1.5
  Top Layer w0.5: R60.2 C63.1@4.288,46.475
NetD1_2: D1.2 R4.1 | length 2
  Top Layer w0.254: R4.1 D1.2
NetJ4_2: J4.2 R15.1 | length 5
  Top Layer w0.4: J4.2 82.5,55 83,54.5 R15.1
NetJ4_3: J4.3 R16.1 | length 5.2
  Top Layer w0.4: J4.3 80.5,55.1 81.5,54.1 R16.1
NetR1_1: R1.1 R2.2 U2.4 | length 7
  Top Layer w0.4: R2.2 R1.1 90.77,21.058 U2.4
NetR6_2: R6.2 R7.2 R10.1 | length 7
  Top Layer w0.4: R10.1 79.3,47 80.3,46 R6.2 R7.2
NetR8_2: R8.2 R9.2 R11.1 | length 7.4
  Top Layer w0.4: R11.1 78.4,45 80.4,43 R8.2 R9.2
NetR10_2: R10.2 R13.1 U4.13 | length 6
  Top Layer w0.3: R10.2 77.212,48.425 R13.1
  Top Layer w0.4: U4.13 73.827,45.04 R10.2
NetR11_2: R11.2 R12.2 U4.12 | length 4.7
  Top Layer w0.4: U4.12 74.33,43.77 74.6,43.5 R12.2 R11.2
NetR13_2: R13.2 R14.1 U4.14 | length 5.8
  Top Layer w0.4: U4.14 72.725,46.925 74.3,48.5 R13.2 R14.1
NetR18_2: R18.2 U4.10 | length 3.2
  Top Layer w0.4: U4.10 74.33,41.23 74.6,41.5 R18.2
NetR19_2: R19.2 R20.1 U4.9 | length 5.8
  Top Layer w0.3: R19.2 77.212,37.075 R20.1
  Top Layer w0.4: U4.9 73.44,39.96 74.9,38.5 R19.2
NetR20_2: R20.2 R21.1 U4.8 | length 5.9
  Top Layer w0.4: U4.8 72.725,37.575 73.213,37.087 R21.1 74,36 75,37 R20.2
NetR30_2: R30.2 R31.1 U5.8 U5.9 | length 12.1
  Top Layer w0.3: R30.2 79.287,14.425 R31.1
  Top Layer w0.4: U5.9 U5.8 72.725,17.975 76.2,14.5 R30.2
NetR45_2: R45.2 R46.1 U4.1 U4.2 | length 16.2
  Top Layer w0.254: R46.1 59,50 61.6,52.6 63.1,52.6 63.5,52.2 63.5,50.713 R45.2
  Top Layer w0.4: R45.2 64.9,50 67.275,47.625 U4.1 U4.2
NetR50_2: R50.2 R51.1 U6.8 | length 5.6
  Top Layer w0.254: U6.8 40.475,29.675 41.087,30.288 R50.2 R51.1
NetR52_2: R52.2 U6.16 | length 5.4
  Top Layer w0.254: U6.16 40,36.103 40,38.787 R52.2
OUT_HIGH_N: C59.1 J5.1 L4.2 R60.1 | length 5.1
  Top Layer w0.8: R60.1@6,45 9,45 C59.1
OUT_HIGH_P: C58.2 J5.2 L3.2 R59.2 | length 3.4
  Top Layer w0.8: C58.2 14.5,35.5 R59.2@14.5,33.5
OUT_LOW_N: C57.1 J5.3 L2.2 R58.1 | length 3.7
  Top Layer w0.8: C57.1 14.5,24.5 R58.1
OUT_LOW_P: C56.2 J5.4 L1.2 R57.2 | length 5.1
  Top Layer w0.8: R57.2@6,15 9,15 C56.2
PLAY/PAUSE: J3.5 U3.50 | length 27.1
  Top Layer w0.254: U3.50 101.3,55 v1(101.8,54.5)
  Bottom Layer w0.254: v1(101.8,54.5) 101.6,54.3 101.6,37.4 J3.5
PRE_HIGH_OUT: R46.2 R47.2 VR2.1 | length 11.1
  Top Layer w0.4: VR2.1 53,52 55,50 R46.2 R47.2
PRE_LOW_OUT: JP2.2 VR1.1 | length 34.2
  Bottom Layer w0.5: VR1.1 63.5,54.5 65.5,52.5 65.5,37.5 68.4,34.6 75.36,34.6 JP2.2
PWR_HIGH_IN: C35.1 VR2.2 | length 25.1
  Bottom Layer w0.5: VR2.2 51,37.75 C35.1
PWR_LOW_IN: C33.1 VR1.2 | length 42.3
  Bottom Layer w0.5: C33.1 54.75,22.85 58.7,26.8 58.7,54.7 VR1.2
RED_LED: D1.1 U3.37 | length 2.2
  Top Layer w0.254: U3.37 101.2,44.6 101.55,44.25 D1.1
V+: C1.1 C2.2 C4.1 C5.1 C6.2 C10.2 C11.2 C12.1 C15.2 C16.2 C17.1 C39.2 C40.2 C41.1 C42.1 C44.2 C45.2 C46.1 C47.1 J1.1 Q1.1 Q1.3 R48.2 U1.1 U2.1 U2.5 U4.4 U5.4 U6.17 U6.18 U6.19 U6.31 U6.32 | length 126.5
  Top Layer w0.254: R48.2 39.288,14.912 40.741,13.459 C46.1 ; U2.1 86.96,23.96 v1(87.5,24.5) ; v1(91.5,24.5) 92.04,23.96 U2.5
  Top Layer w0.6: C46.1 50.859,13.459 50.859,27.7 63.7,27.7 64.238,27.162 C16.2 C15.2 C17.1 64.8,23.5 65.8,22.5 U5.4 ; C41.1 50.059,46.541 51.1,45.5 ; 51.3,45.3 51.1,45.5 ; C12.1 C11.2 ; U4.4 C11.2 ; U2.5 92.04,20.04 91.763,19.763 C6.2 C5.1 91.763,14.837 95.6,11 101.738,11 ; U1.1 95.7,19.599 96.738,18.562 C2.2 C1.1 101.738,11 ; J1.1 101.738,11 ; 51.1,45.5 63.5,45.5 64.238,44.762 C10.2 C11.2
  Bottom Layer w0.254: v1(87.5,24.5) v1(91.5,24.5)
VOL_DOWN: J3.2 U3.24 | length 24.4
  Top Layer w0.254: v1(91.4,39.8) 91.4,42 U3.24
  Bottom Layer w0.254: v1(91.4,39.8) 91.5,39.8 105.8,25.5 J3.2
VOL_UP: J3.1 U3.23 | length 26.8
  Top Layer w0.254: v1(90.2,39.4) 90.2,40.4 90.7,40.9 U3.23
  Bottom Layer w0.254: v1(90.2,39.4) 106.1,23.5 J3.1
VREF: C7.1 JP1.3 R1.2 R12.1 R17.1 R19.1 R33.1 U2.2 U5.5 | length 75.4
  Top Layer w0.4: U5.5 68.17,21.23 74.713,14.687 R33.1 74.713,7.129 75.642,6.2 78.7,6.2 82.5,10 82.5,15 86,18.5 86.2,18.5 ; R12.1 78,43.5 78.7,42.8 78.7,40.7 78,40 R17.1 R19.1 81.5,34.212 81.5,31.92 JP1.3 82.4,27.18 82.4,24.3 82.925,23.775 C7.1 84,20.7 86.2,18.5 ; U2.2 88.23,19.943 R1.2 86.2,18.5
pads on no net: S1.1 U3.5 U3.6 U3.12 U3.29 U3.34 U3.35 U3.36 U3.38 U3.39 U3.45 U3.46 U3.47 U3.48 U3.49

## Polygon pours and split planes (outlines as drawn)
GND on Top Layer "GND_FILTER" (solid, remove dead copper, pour order 70): 43.5,59.5 109.5,59.5 109.5,7.5 43.5,7.5
V+ on Top Layer "V+_L01_P042" (solid, pour order 42): 109.5,12.5 109.5,0.5 84.6,0.5 44.5,0.5 43.5,1.5 43.5,9.5 42.524,10.476 40.476,10.476 39.5,9.5 39.5,7.452 38.548,6.5 36.25,6.5 32.5,6.5 31.625,7.375 31.625,12.125 33.25,13.75 33.25,19.5 33.25,23.5 32.5,24.25 31,24.25 30.5,24.75 30.5,26 33,26 36,23 36,17.5 38.2,15.3 47.117,15.3 ccw(c47.117,16.707) 48.112,15.712 49.159,16.759 ccw(c48.334,17.583) 49.5,17.583 49.5,43.4 48.341,44.559 ccw(c47.518,43.735) 47.517,44.9 36.9,44.9 35.25,43.25 35.25,36.5 35.25,36 32.75,33.5 30.75,33.5 30.75,35.5 31.25,36 33.25,36 33.25,46.35 31.625,47.975 31.625,52.825 32.3,53.5 38.5,53.5 39.5,52.5 39.5,50.5 40.5,49.5 43,49.5 51.5,49.5 53.5,47.5 53.5,43.1 53.5,10.476 56.625,7.5 83.75,7.5 90.25,14 108,14
NetC49_2 on Top Layer "NETC49_2_L01_P058" (solid, remove dead copper, pour order 58): 16.5,20 16.5,24.5 17,25 21,25 21.5,25.5 21.5,27 22,27.5 26.238,27.5 27.263,28.525 31.75,28.525 31.75,28.225 30.141,28.225 29.812,28.225 28,26.413 28,20 27,19 17.5,19
NetC48_2 on Top Layer "NETC48_2_L01_P050" (solid, remove dead copper, pour order 50): 31.8,26.925 30.648,26.925 ccw(c30.648,26.052) 29.8,26.261 29.8,21.35 32.175,18.975 32.6,18.975 32.6,14.88 30.25,12.473 30.25,2 29.75,1.5 14.5,1.5 14,2 14,7 14.5,7.5 24.5,7.5 25.5,8.5 25.5,13 26,13.5 28.15,13.5 28.5,13.85 28.5,26.384 29.321,27.204 30.65,27.225 31.8,27.225
NetC50_2 on Top Layer "NETC50_2_L01_P038" (solid, remove dead copper, pour order 38): 16.5,40 16.5,35.5 17,35 21,35 21.5,34.5 21.5,33 22,32.5 26,32.5 27.7,30.8 31.725,30.8 31.725,31.125 30.65,31.125 29.575,31.125 28,32.7 28,40 27,41 17.5,41
NetC51_2 on Top Layer "NETC51_2_L01_P036" (solid, remove dead copper, pour order 36): 31.8,32.478 30.446,32.478 cw(c30.546,33.239) 29.8,33.061 29.8,38.7 32,40.9 32.7,40.9 32.7,44.9 30.3,47.3 30.3,49.2 30.3,58.2 30,58.5 14.5,58.5 14,58 14,53 14.5,52.5 24.5,52.5 25,52 25,47.5 26,46.5 27.5,46.5 28.5,45.5 28.5,32.875 29.25,32.125 31.8,32.125
GND on Top Layer "GND_L01_P068" (solid, pour order 68): 23.475,44.5 49.5,44.5 49.5,15.5 23.475,15.5
GND on Top Layer "GND_LEFT_HALF" (solid, remove dead copper, pour order 62): 0.5,59.5 44.4,59.5 44.4,0.5 0.5,0.5
OUT_LOW_P on Top Layer "OUT_LOW_P_L01_P046" (solid, remove dead copper, pour order 46): 25,8.5 25,13 24.5,13.5 15.5,13.5 11,18 11,21 7.3,24.7 3,24.7 2.5,24.2 2.5,20 14.5,8 24.5,8
OUT_LOW_N on Top Layer "OUT_LOW_N_L01_P044" (solid, remove dead copper, pour order 44): 28,14.5 28,18.5 27.5,19 17,19 16,20 16,23.526 9.483,29.7 3,29.7 2.5,29.2 2.5,25.8 3,25.3 7.2,25.3 11.5,21 11.5,18.143 15.643,14 27.5,14
OUT_HIGH_N on Top Layer "OUT_HIGH_N_L01_P028" (solid, remove dead copper, pour order 28): 25,51.5 25,47 24.5,46.5 15.5,46.5 11,42 11,39 7.3,35.3 3,35.3 2.5,35.8 2.5,40 14.5,52 24.5,52
OUT_HIGH_P on Top Layer "OUT_HIGH_P_L01_P026" (solid, remove dead copper, pour order 26): 28,45.5 28,41.5 27.5,41 17,41 16,40 16,36.474 9.483,30.3 3,30.3 2.5,30.8 2.5,34.2 3,34.7 7.2,34.7 11.5,39 11.5,41.857 15.643,46 27.5,46
V+ on Bottom Layer "V+_L02_P052" (solid, remove dead copper, pour order 52): 106.5,8 90.5,8 90,8.5 90,12.5 90.5,13 94.5,13 95,13.5 95,21 95.5,21.5 100,21.5 100.5,21 100.5,13.5 101,13 106.5,13 107,12.5 107,8.5
GND on Bottom Layer "GND_L02_P054" (solid, remove dead copper, pour order 54): 0.5,59.499 109.5,59.499 109.5,0.499 0.5,0.499

## Keep-outs
Keep-Out Layer:
  lines w1: -0.5,-0.5 -0.5,60.5 110.5,60.5 110.5,-0.5 -0.5,-0.5

## Other copper
Top Layer:
  region net GND: 94.2,41.6 93.6,41.6 93.6,42.9 93.6,43.3 94.2,43.3 94.2,42.9
  region net V+: 53.5,46.347 54.1,45.747 54.1,45.3 53.5,44.7
  region net V+: 54.5,27.7 53.5,26.7 53.5,28.7
  region net NetC28_2: 64.413,19.09 64.613,18.89 67.275,18.89 67.275,18.49 60.185,18.49 60.185,18.89 63.813,18.89 64.013,19.09 64.013,20.5 64.413,20.5
  pour cut-out: 63.8,28.2 61.5,28.2 62.1,28.8 62.1,44.489 61.594,44.994 63.8,45.2

## Silkscreen, mask and mechanical layers (free items; w line width, h text height)
Bottom Overlay:
  text "FAULTz" at 47.5,56 h1 r90
  text "MUTE" at 58,56 h1 r90
  text "nRST" at 85,56 h1 r90
  text "BLUETOOTH TPA3118 AMP / VERSION 2 / YL 2016" at 42.2,47.6 h1.27
  text "LINK" at 105.5,33.1 h1
  text "PLAY" at 105.5,31.1 h1
  text "BACK" at 105.5,29 h1
  text "FWD" at 105.5,27 h1
  text "VOL_DN" at 105.5,25 h1
  text "VOL_UP" at 105.5,23 h1